# Altium PCB btretro_pcb.PcbDoc (part 2 of 2)
Units mm, origin at the board's own origin, x right, y up, seen from the top; angles counter-clockwise.
Board outline 100 x 100 mm, 2 copper layers (Top Layer, Bottom Layer); 79 components, 68 nets, 387 pads, 70 vias.
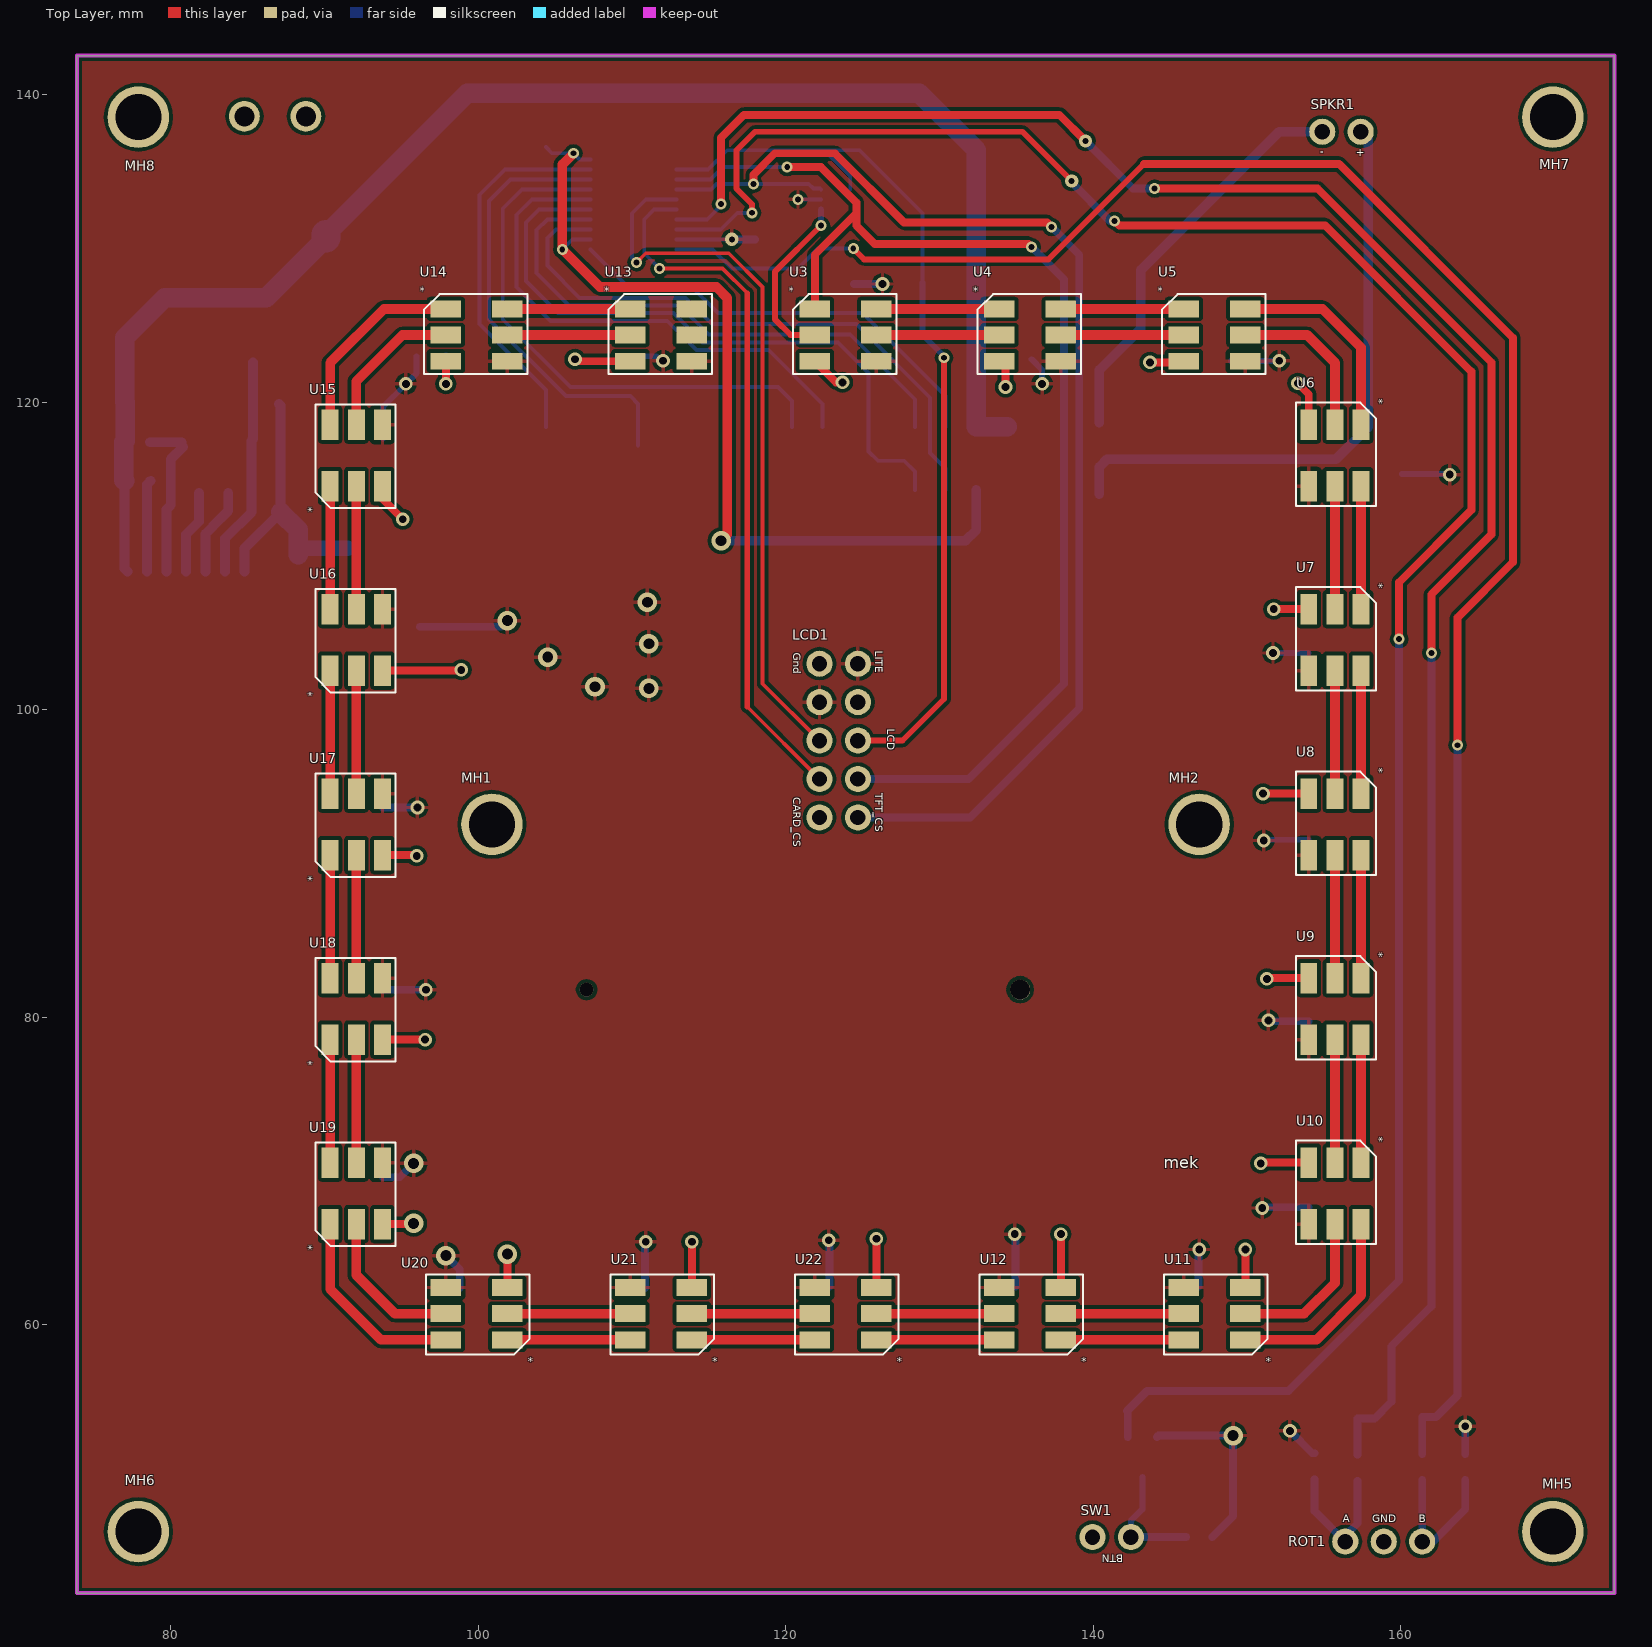
[diagram p0: Top Layer view]

## Via types
v1: diameter 0.889, hole 0.508, Top Layer to Bottom Layer, 36 vias
v2: diameter 0.711, hole 0.381, Top Layer to Bottom Layer, 19 vias
v3: diameter 1.27, hole 0.711, Top Layer to Bottom Layer, 12 vias
v4: diameter 0.864, hole 0.406, Top Layer to Bottom Layer, 2 vias
v5: diameter 0.864, hole 0.381, Top Layer to Bottom Layer, 1 vias

## Nets (pads, with @x,y where several pads share a name; then routed paths per layer and width w, separated by ;. In a path a pad name is that pad's centre, name@x,y a point inside that pad or via, vN(x,y) a via of type N, cw(c..) or ccw(c..) an arc to the next point about the centre after c; other vN are vias at no path point) (continued)
DB_ROT_B: (continued)
  Bottom Layer w0.254: U1.1 109.55,127.7 113.7,127.7 115.6,125.8 125,125.8 130.4,120.4 J2.34
DB_SPI0_CLK: J2.8 U1.9 | length 24.8
  Bottom Layer w0.254: J2.8 104.4,120.8 100.1,125.1 100.1,133.5 101.75,135.15 U1.9
DB_SPI0_MOSI: J2.14 U1.8 | length 29.6
  Bottom Layer w0.254: U1.8 102.1,134.5 100.7,133.1 100.7,125.4 105.7,120.4 109.9,120.4 110.4,119.9 J2.14 J2.14@110.4,117.2
DB_SPI_CS: J2.24 U1.7 | length 36.1
  Bottom Layer w0.254: U1.7 102.85,133.85 101.6,132.6 101.6,125.4 106,121 119.5,121 120.4,120.1 J2.24
GND: C1.2 C2.1 C6.1 C7.1 C8.1 C9.1 C10.1 C11.1 C12.1 C13.1 C14.1 C15.1 C16.1 C17.1 C18.1 C19.1 C20.1 C21.1 C22.1 C23.1 C24.1 C25.1 C26.1 C27.1 C28.1 C29.1 C30.1 C31.1 C32.1 C33.1 J1.6 J1.12 J1.13 J1.18 J1.19 J1.24 J1.25 J1.30 J1.31 J1.37 J1.40 J1.43 J1.46 J1.49 J1.52 J1.55 J1.58 J2.1 J2.2 J2.39 J2.40 J3.4 LCD1.10 PWR1.2 PWR1.3 R3.2 R6.1 ROT1.2 SW1.2 U1.11 U2.4 U2.8 U3.3 U4.3 U5.3 U6.3 U7.3 U8.3 U9.3 U10.3 U11.3 U12.3 U13.3 U14.3 U15.3 U16.3 U17.3 U18.3 U19.3 U20.3 U21.3 U22.3 U23.3 U24.2 U24.3 | length 62.3
  Top Layer w0.508: U19.3 95.75,66.55 v3(95.8,66.6) ; U18.3 v1(96.55,78.55) v1@96.6,78.6 ; U17.3 95.95,90.55 v1(96,90.5) ; U16.3 98.85,102.55 v1(98.9,102.6) ; U15.3 93.775,113.725 v1(95.1,112.4) ; v1(97.9,121.2) U14.3 ; U20.3 102,62.525 101.9,62.625 v3(101.9,64.6) ; v1@106.5,122.8 106.625,122.675 U13.3 ; U21.3 v1(113.9,65.4) ; U3.3 123.275,121.3 v1(123.7,121.3) ; U22.3 v1(125.9,65.6) ; U4.3 134.238,122.337 134.273,122.373 134.3,122.346 v1(134.3,121) ; U12.3 v1(137.9,65.9) ; v1(143.7,122.6) 145.825,122.6 U5.3 ; U11.3 v1(149.9,64.9) ; v1(150.9,70.5) 150.95,70.55 U10.3 ; v1@151,94.6 v1(151.05,94.55) U8.3 ; v1(151.3,82.5) 151.35,82.55 U9.3 ; v1@151.7,106.6 v1(151.75,106.55) U7.3 ; v1(153.31,121.248) 154.025,120.533 U6.3
  Bottom Layer w0.508: v1(97.9,121.2) C29.1
  Bottom Layer w0.635: U2.4 81,111.4 81.85,112.25 C10.1
  other v1: 106.3,122.8
LCD_DAT: LCD1.7 U1.16 | length 45.9
  Top Layer w0.254: v2(111.8,128.7) 115.9,128.7 117.5,127.1 ; 117.5,100.2 LCD1.7
  Top Layer w0.381: 117.5,100.2 117.5,127.1
  Bottom Layer w0.254: v2(111.8,128.7) 110.8,129.7 110.8,131.9 111.45,132.55 U1.16
LCD_RST: LCD1.8 U1.15 | length 47
  Top Layer w0.254: v2(110.3,129.1) 110.9,129.7 116.3,129.7 118.5,127.5 118.5,101.7 LCD1.8
  Bottom Layer w0.254: v2(110.3,129.1) 110,129.4 110,132.3 110.9,133.2 U1.15
LS_EXP_1P8: C1.1 J2.35 U1.2 U1.10 | length 59.4
  Top Layer w0.635: v2(106.2,136.2) 105.472,135.472 v2(105.472,129.95) 107.922,127.5 115.5,127.5 116.2,126.8 116.2,111.4 v3(115.8,111)
  Bottom Layer w0.254: C1.1 104.8,136.2 v2(106.2,136.2) 106.6,135.8 U1.10 ; v2(105.472,129.95) 106.122,130.6 U1.2
  Bottom Layer w0.635: v3(115.8,111) 131.7,111 132.4,111.7 J2.35
NetJ3_1: J3.1 SPKR1.1 | length 39.8
  Bottom Layer w0.635: J3.1 140.4,115.8 140.9,116.3 155.8,116.3 157.9,118.4 157.9,137.1 SPKR1.1
NetJ3_2: J3.2 SPKR1.2 | length 26.8
  Bottom Layer w0.635: J3.2 140.4,122.1 143.1,124.8 143.1,128.6 152.1,137.6 154.5,137.6 SPKR1.2@154.925,137.175
NetR7_1: R7.1 SW1.1 U23.2 | length 7.8
  Bottom Layer w0.381: SW1.1 142.455,47.255 143.2,48 U23.2
  Bottom Layer w0.508: SW1.1 142.461,46.2 R7.1
NetR8_1: R8.1 R10.2 ROT1.1 | length 9.2
  Bottom Layer w0.508: R8.1 154.4,47.9 ROT1.1 156.4,46.3 157.2,47.1 R10.2
NetR9_1: R9.1 R11.2 ROT1.3 | length 9.6
  Bottom Layer w0.508: R11.2 ROT1.3 162.1,45.9 164.2,48 R9.1
NetU3_2: U3.2 U24.4 | length 11.4
  Top Layer w0.381: U3.2 120.325,124.375 119.3,125.4 119.3,128.5 v2(122.3,131.5)
  Bottom Layer w0.381: v2(122.3,131.5) U24.4
NetU3_5: U3.5 U4.2 | length 8
  Top Layer w0.635: U3.5 U4.2
NetU3_6: U3.6 U4.1 | length 8
  Top Layer w0.635: U3.6 U4.1
NetU4_5: U4.5 U5.2 | length 8
  Top Layer w0.635: U4.5 U5.2
NetU4_6: U4.6 U5.1 | length 8
  Top Layer w0.635: U4.6 U5.1
NetU5_5: U5.5 U6.2 | length 10.6
  Top Layer w0.635: U5.5 153.925,124.375 155.725,122.575 U6.2
NetU5_6: U5.6 U6.1 | length 13.6
  Top Layer w0.635: U5.6 154.925,126.075 157.425,123.575 U6.1
NetU6_5: U6.5 U7.2 | length 8
  Top Layer w0.635: U7.2 U6.5
NetU6_6: U6.6 U7.1 | length 8
  Top Layer w0.635: U7.1 U6.6
NetU7_5: U7.5 U8.2 | length 8
  Top Layer w0.635: U8.2 U7.5
NetU7_6: U7.6 U8.1 | length 8
  Top Layer w0.635: U8.1 U7.6
NetU8_5: U8.5 U9.2 | length 8
  Top Layer w0.635: U9.2 U8.5
NetU8_6: U8.6 U9.1 | length 8
  Top Layer w0.635: U9.1 U8.6
NetU9_5: U9.5 U10.2 | length 8
  Top Layer w0.635: U10.2 U9.5
NetU9_6: U9.6 U10.1 | length 8
  Top Layer w0.635: U10.1 U9.6
NetU10_5: U10.5 U11.2 | length 10.5
  Top Layer w0.635: U11.2 153.725,60.725 155.725,62.725 U10.5
NetU10_6: U10.6 U11.1 | length 13.4
  Top Layer w0.635: U11.1 154.525,59.025 157.425,61.925 U10.6
NetU11_5: U11.5 U12.2 | length 8
  Top Layer w0.635: U12.2 U11.5
NetU11_6: U11.6 U12.1 | length 8
  Top Layer w0.635: U12.1 U11.6
NetU12_5: U12.5 U22.2 | length 8
  Top Layer w0.635: U22.2 U12.5
NetU12_6: U12.6 U22.1 | length 8
  Top Layer w0.635: U22.1 U12.6
NetU13_1: U13.1 U14.6 | length 8
  Top Layer w0.635: U14.6 U13.1
NetU13_2: U13.2 U14.5 | length 8
  Top Layer w0.635: U14.5 U13.2
NetU14_1: U14.1 U15.6 | length 13
  Top Layer w0.635: U15.6 90.375,122.575 93.875,126.075 U14.1
NetU14_2: U14.2 U15.5 | length 9.9
  Top Layer w0.635: U15.5 92.075,121.375 95.075,124.375 U14.2
NetU15_1: U15.1 U16.6 | length 8
  Top Layer w0.635: U16.6 U15.1
NetU15_2: U15.2 U16.5 | length 8
  Top Layer w0.635: U16.5 U15.2
NetU16_1: U16.1 U17.6 | length 8
  Top Layer w0.635: U17.6 U16.1
NetU16_2: U16.2 U17.5 | length 8
  Top Layer w0.635: U17.5 U16.2
NetU17_1: U17.1 U18.6 | length 8
  Top Layer w0.635: U18.6 U17.1
NetU17_2: U17.2 U18.5 | length 8
  Top Layer w0.635: U18.5 U17.2
NetU18_1: U18.1 U19.6 | length 8
  Top Layer w0.635: U19.6 U18.1
NetU18_2: U18.2 U19.5 | length 8
  Top Layer w0.635: U19.5 U18.2
NetU19_1: U19.1 U20.6 | length 13.1
  Top Layer w0.635: U19.1 90.375,62.325 93.675,59.025 U20.6
NetU19_2: U19.2 U20.5 | length 10.2
  Top Layer w0.635: U19.2 92.075,63.225 94.575,60.725 U20.5
NetU20_1: U20.1 U21.6 | length 8
  Top Layer w0.635: U20.1 U21.6
NetU20_2: U20.2 U21.5 | length 8
  Top Layer w0.635: U20.2 U21.5
NetU21_1: U21.1 U22.6 | length 8
  Top Layer w0.635: U21.1 U22.6
NetU21_2: U21.2 U22.5 | length 8
  Top Layer w0.635: U21.2 U22.5
PB: U1.18 U23.4 | length 148.7
  Top Layer w0.381: v2(117.813,132.328) 117.813,132.887 116.8,133.9 116.8,136.4 118,137.6 135.4,137.6 v4(138.6,134.4)
  Top Layer w0.508: v2(141.4,131.8) 141.7,131.5 155.1,131.5 164.6,122 164.6,113 159.9,108.3 v2(159.9,104.6)
  Bottom Layer w0.254: U1.18 115.775,131.25 116.853,132.328 v2(117.813,132.328)
  Bottom Layer w0.508: v4@138.5,134.4 141.1,131.8 v2(141.4,131.8) ; U23.4 142.25,54.35 142.2,54.4 143.5,55.7 152.7,55.7 159.9,62.9 v2(159.9,104.6)
REGFB2: C5.1 R2.1 R3.1 U2.6 | length 14.3
  Bottom Layer w0.635: U2.6 83.54,111.14 85.25,112.85 C5.1 85.35,117.6 R2.1 R3.1
RON2: R5.2 U2.2 | length 6
  Bottom Layer w0.635: U2.2 78.46,114.66 R5.2
ROT_A: C32.2 R10.1 U1.17 | length 140.5
  Top Layer w0.508: v2(115.8,132.9) 115.8,137.204 117.296,138.7 137.8,138.7 v4(139.5,137) ; v2(144,133.9) 154.6,133.9 165.9,122.6 165.9,111.4 162,107.5 v2(162,103.7)
  Bottom Layer w0.254: U1.17 114.9,131.9 115.8,132.8 v2(115.8,132.9)
  Bottom Layer w0.508: v4@139.4,137.1 v4(139.5,137) 142.6,133.9 v2(144,133.9) ; R10.1 C32.2 158.3,53.9 159.4,55 159.4,58.6 162,61.2 v2(162,103.7)
ROT_B: C33.2 R11.1 U1.20 | length 138.6
  Top Layer w0.381: v2(124.4,130) 125.1,129.3 137.1,129.3 143.3,135.5
  Top Layer w0.508: 143.3,135.5 156,135.5 167.3,124.2 167.3,109.6 163.7,106 v2(163.7,97.7)
  Bottom Layer w0.254: U1.20 115.25,129.95 116.5,128.7 120.8,128.7 122.1,130 v2(124.4,130)
  Bottom Layer w0.508: R11.1 C33.2 162.3,54 163.7,55.4 v2(163.7,97.7)
SPI_CLK: LCD1.3 U1.12 U24.1 | length 60.4
  Top Layer w0.381: LCD1.3 127.6,98 130.3,100.7 v2(130.3,122.9)
  Bottom Layer w0.254: U1.12 114.95,135.15 116.2,136.4 122.5,136.4 ; U24.1 124.2,134.7 122.5,136.4 ; 128.9,127.8 128.9,132.3 124.8,136.4 122.5,136.4
  Bottom Layer w0.381: 128.9,127.8 128.9,124.4 130.3,123 v2(130.3,122.9)
SPI_CS: LCD1.5 U1.14 U24.6 | length 81.6
  Top Layer w0.508: v2(117.904,134.2) 117.904,134.804 119.3,136.2 123.2,136.2 127.7,131.7 137,131.7 v2(137.3,131.4)
  Bottom Layer w0.254: U1.14 115.15,133.85 115.5,134.2 v2(117.904,134.2) 121.5,134.2 121.8,133.9 122.25,133.9 U24.6
  Bottom Layer w0.508: LCD1.5 132,93 139.1,100.1 139.1,129.6 v2(137.3,131.4)
SPI_MOSI: LCD1.4 U1.13 U3.1 | length 79.1
  Top Layer w0.508: v2(120.1,135.3) 122.3,135.3 124.6,133 124.6,132.3 ; U3.1 121.9,129.6 124.6,132.3 ; v2(136,130.1) 135.8,130.3 125.8,130.3 124.6,131.5 124.6,132.3
  Bottom Layer w0.254: U1.13 115.1,134.5 115.91,135.31 120.09,135.31 v2(120.1,135.3)
  Bottom Layer w0.508: LCD1.4 131.9,95.5 138.1,101.7 138.1,128 v2(136,130.1)
V_EN_DIV_2: R4.1 R6.2 U2.3 | length 10.6
  Bottom Layer w0.635: R4.1 R6.2 ; U2.3 79.73,113.03 80,113.3 80,116.3 R6.2@80.8,117.1
pads on no net: J1.1 J1.2 J1.3 J1.4 J1.5 J1.7 J1.8 J1.9 J1.10 J1.11 J1.14 J1.15 J1.16 J1.17 J1.20 J1.21 J1.22 J1.23 J1.26 J1.27 J1.28 J1.29 J1.32 J1.33 J1.34 J1.35 J1.36 J1.38 J1.39 J1.41 J1.42 J1.44 J1.45 J1.47 J1.48 J1.50 J1.51 J1.53 J1.54 J1.56 J1.57 J1.59 J1.60 J1.MH1 J1.MH2 J2.3 J2.4 J2.5 J2.6 J2.7 J2.9 J2.10 J2.11 J2.12 J2.13 J2.15 J2.16 J2.17 J2.18 J2.19 J2.20 J2.21 J2.22 J2.23 J2.25 J2.27 J2.28 J2.29 J2.30 J2.37 J3.3 J3.5 J3.6 J3.7 J3.8 J3.9 J3.10 J3.11 J3.12 J3.13 J3.14 J3.15 J3.16 LCD1.2 LCD1.6 MH1.MH MH2.MH MH5.MH MH6.MH MH7.MH MH8.MH PWR1.MH1 PWR1.MH2 U13.5 U13.6 U23.1

## Polygon pours and split planes (outlines as drawn)
5V on Bottom Layer "5V_L02_P000" (solid, pour order 0): 112.1,111.2 112.1,100.2 105.6,100.2 96.5,109.3 87.3,109.3 87.3,111.2
GND on Bottom Layer "Bottom Layer-No Net" (solid, pour order 2): 73.9,142.55 73.9,42.55 173.9,42.55 173.9,142.55
5V on Top Layer "5V_L01_P004" (solid, pour order 4): 73.9,142.55 73.9,42.55 173.9,42.55 173.9,142.55

## Keep-outs
Keep-Out Layer:
  the board outline again, w0.254

## Silkscreen, mask and mechanical layers (free items; w line width, h text height)
Top Overlay:
  text "mek" at 144.6,70.2 h0.76

## Text inside footprints (layer, text, board x,y; h text height)
LCD1: Top Overlay "LCD" at 126.605,98.762 h0.5 r270; Top Overlay "LITE" at 125.843,103.842 h0.5 r270; Top Overlay "TFT_CS" at 125.843,94.571 h0.5 r270; Top Overlay "CARD_CS" at 120.509,94.317 h0.5 r270; Top Overlay "Gnd" at 120.509,103.715 h0.5 r270
ROT1: Top Overlay "A" at 156.233,47.17 h0.5; Top Overlay "GND" at 158.138,47.17 h0.5; Top Overlay "B" at 161.186,47.17 h0.5
SPKR1: Top Overlay "+" at 157.654,136.457 h0.5 r180; Top Overlay "-" at 154.987,136.457 h0.5 r180
SW1: Top Overlay "BTN" at 141.947,45.051 h0.5 r180
U2: Bottom Overlay "1" at 75.3,112.3 h0.64 r180
U3: Top Overlay "*" at 120.217,127.042 h0.5
U4: Top Overlay "*" at 132.217,127.042 h0.5
U5: Top Overlay "*" at 144.217,127.042 h0.5
U6: Top Overlay "*" at 158.392,120.233 h0.5 r270
U7: Top Overlay "*" at 158.392,108.233 h0.5 r270
U8: Top Overlay "*" at 158.392,96.233 h0.5 r270
U9: Top Overlay "*" at 158.392,84.233 h0.5 r270
U10: Top Overlay "*" at 158.392,72.233 h0.5 r270
U11: Top Overlay "*" at 151.583,58.058 h0.5 r180
U12: Top Overlay "*" at 139.583,58.058 h0.5 r180
U13: Top Overlay "*" at 108.217,127.042 h0.5
U14: Top Overlay "*" at 96.217,127.042 h0.5
U15: Top Overlay "*" at 89.408,112.867 h0.5 r90
U16: Top Overlay "*" at 89.408,100.867 h0.5 r90
U17: Top Overlay "*" at 89.408,88.867 h0.5 r90
U18: Top Overlay "*" at 89.408,76.867 h0.5 r90
U19: Top Overlay "*" at 89.408,64.867 h0.5 r90
U20: Top Overlay "*" at 103.583,58.058 h0.5 r180
U21: Top Overlay "*" at 115.583,58.058 h0.5 r180
U22: Top Overlay "*" at 127.583,58.058 h0.5 r180
U23: Bottom Overlay "*" at 144.912,49.973 h0.4 r270
U24: Bottom Overlay "*" at 124.327,134.358 h0.4